# Altium PCB NaviGo v3.0.PcbDoc (part 1 of 4)
Units mm, origin at the board's own origin, x right, y up, seen from the top; angles counter-clockwise.
Board outline 144.78 x 52.07 mm, 2 copper layers (Top Layer, Bottom Layer); 380 components, 29 nets, 1630 pads, 230 vias.
Unrouted connection lines stored in the file: 261.
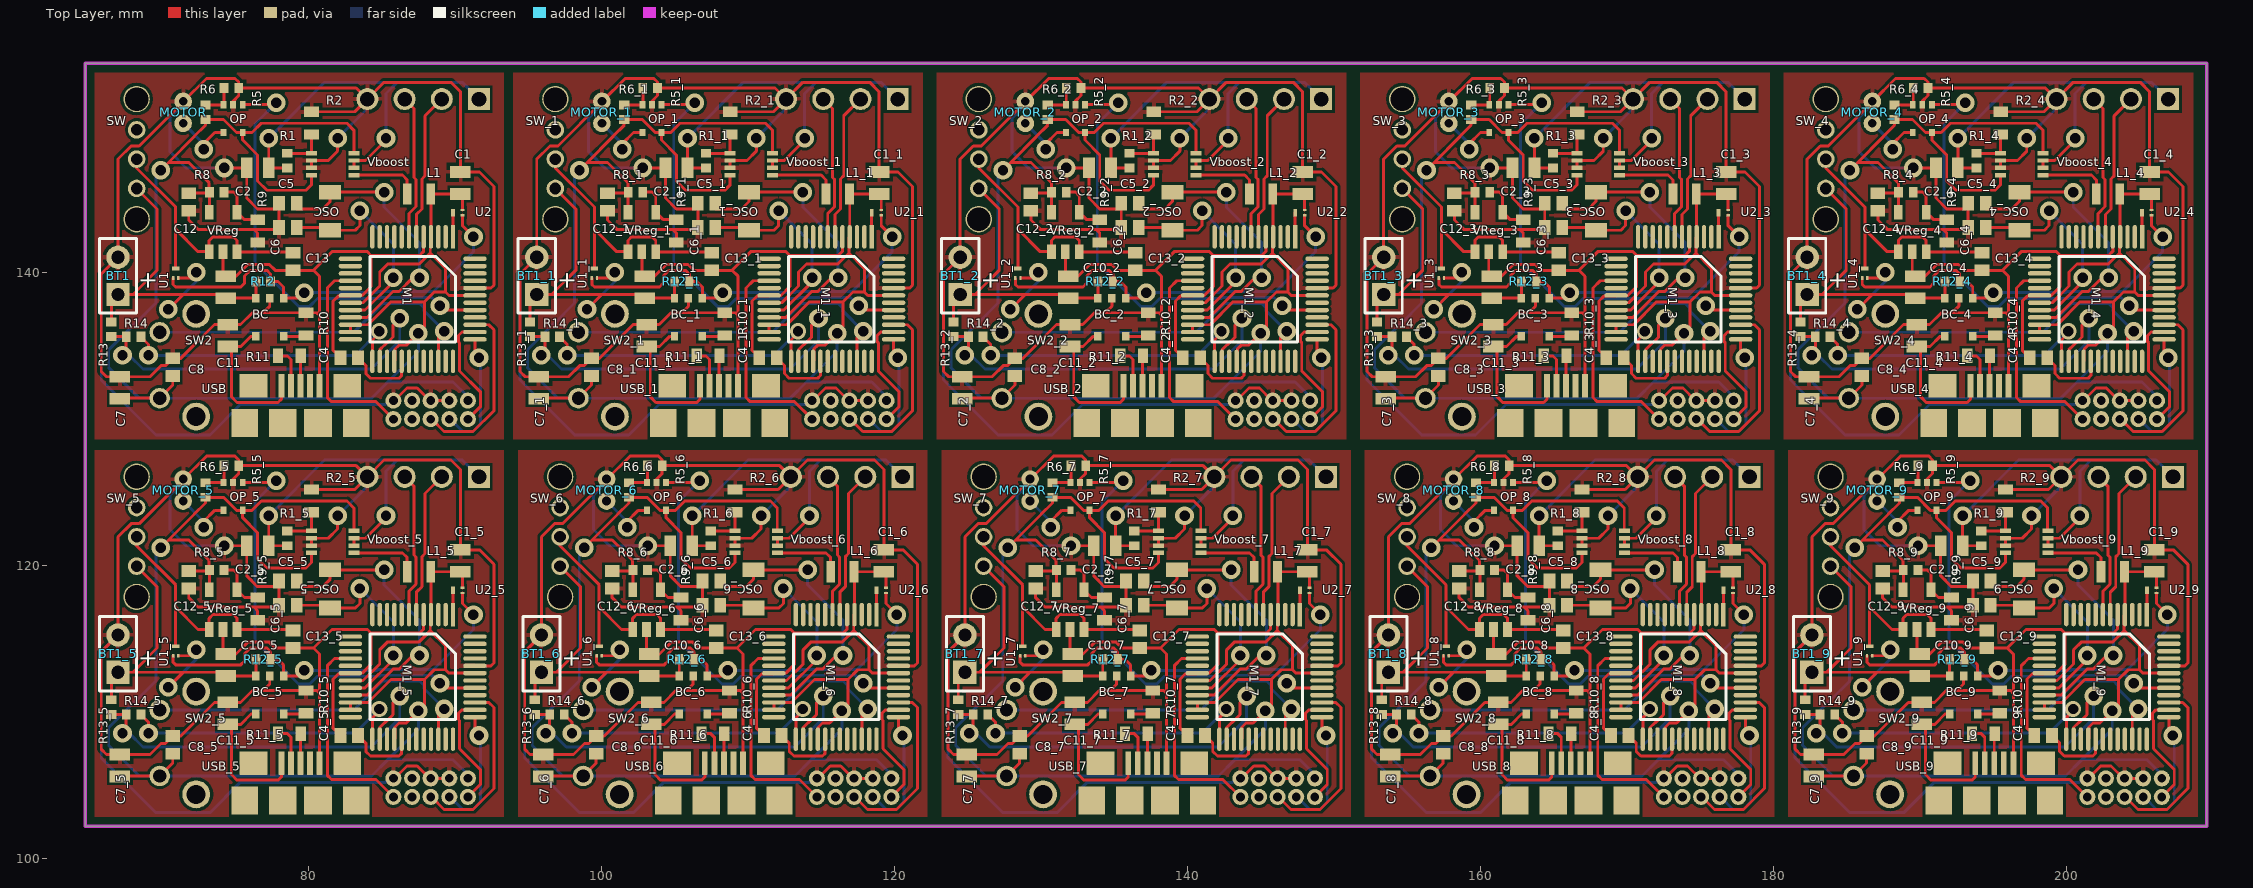
[diagram p0: Top Layer view]
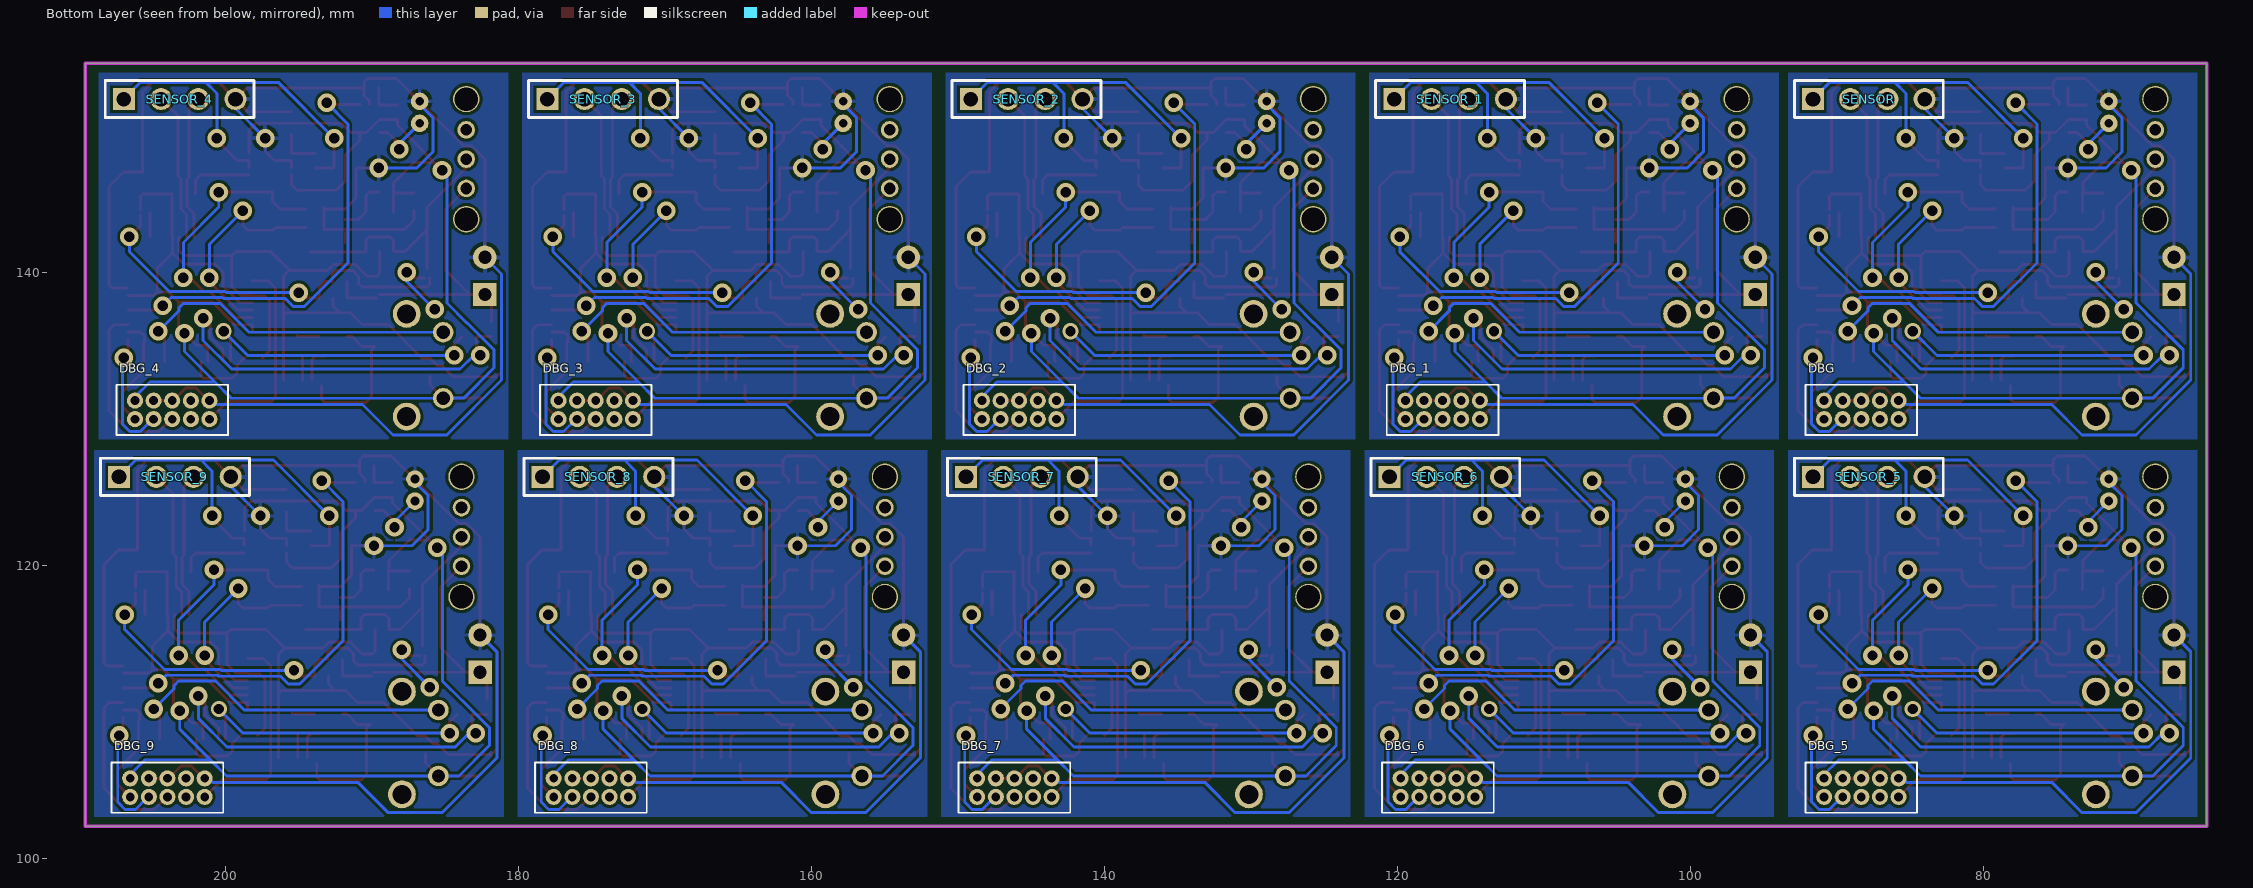
[diagram p1: Bottom Layer view, seen from below]

## Layer stack, top to bottom
Top Layer: signal copper 0.0356
Dielectric: dielectric 0.32, FR-4, Dk 4.8
Bottom Layer: signal copper 0.0356

## Board outline
64.77,102.235 209.55,102.235 209.55,154.305 64.77,154.305

## Design rules (kind name [scope] priority, off if disabled: settings)
Clearance [All] p1: gap=0.2
PolygonConnect [All] p1: connectstyle=Relief reliefconductorwidth=0.254 reliefentries=4 polygonreliefangle="90 Angle" airgapwidth=0.254
RoutingVias [All] p1: holewidth=0.711 width=1.27 viastyle="Through Hole" minholewidth=0.711 minwidth=1.27 maxholewidth=0.711 maxwidth=1.27
SolderMaskExpansion [All] p1: expansion=0.102
Width [All] p1: maxlimit=0.2 minlimit=0.2 preferedwidth=0.2
28 further rules are at their usual default settings.

## Classes and differential pairs
component class "NaviGo v3.0": BC BT1 C1 C2 C4 C5 C6 C7 C8 C10 C11 C12 C13 DBG L1 M1 MOTOR OP OSC R1 R2 R5 R6 R8 R9 R10 R11 R12 R13 R14 SENSOR SW SW2 U1 U2 USB Vboost VReg

## Components (designator, comment, footprint, x,y, rotation, side; value= is the part's Value field where it differs from the comment)
BC "MCP73831T" MCP73831T 78.308,138.271 r180 top
BC_1 "MCP73831T" MCP73831T 106.883,138.271 r180 top (schematic designator BC)
BC_2 "MCP73831T" MCP73831T 135.783,138.271 r180 top (schematic designator BC)
BC_3 "MCP73831T" MCP73831T 164.683,138.271 r180 top (schematic designator BC)
BC_4 "MCP73831T" MCP73831T 193.583,138.271 r180 top (schematic designator BC)
BC_5 "MCP73831T" MCP73831T 78.308,112.49 r180 top (schematic designator BC)
BC_6 "MCP73831T" MCP73831T 107.208,112.49 r180 top (schematic designator BC)
BC_7 "MCP73831T" MCP73831T 136.108,112.49 r180 top (schematic designator BC)
BC_8 "MCP73831T" MCP73831T 165.008,112.49 r180 top (schematic designator BC)
BC_9 "MCP73831T" MCP73831T 193.908,112.49 r180 top (schematic designator BC)
BT1 "Battery" BAT-2 67.005,139.795 r90 top
BT1_1 "Battery" BAT-2 95.58,139.795 r90 top (schematic designator BT1)
BT1_2 "Battery" BAT-2 124.48,139.795 r90 top (schematic designator BT1)
BT1_3 "Battery" BAT-2 153.38,139.795 r90 top (schematic designator BT1)
BT1_4 "Battery" BAT-2 182.28,139.795 r90 top (schematic designator BT1)
BT1_5 "Battery" BAT-2 67.005,114.014 r90 top (schematic designator BT1)
BT1_6 "Battery" BAT-2 95.905,114.014 r90 top (schematic designator BT1)
BT1_7 "Battery" BAT-2 124.805,114.014 r90 top (schematic designator BT1)
BT1_8 "Battery" BAT-2 153.705,114.014 r90 top (schematic designator BT1)
BT1_9 "Battery" BAT-2 182.605,114.014 r90 top (schematic designator BT1)
C1 "4.7u" "Capacitor 0805" 90.373,145.383 r90 top
C1_1 "4.7u" "Capacitor 0805" 118.948,145.383 r90 top (schematic designator C1)
C1_2 "4.7u" "Capacitor 0805" 147.848,145.383 r90 top (schematic designator C1)
C1_3 "4.7u" "Capacitor 0805" 176.748,145.383 r90 top (schematic designator C1)
C1_4 "4.7u" "Capacitor 0805" 205.648,145.383 r90 top (schematic designator C1)
C1_5 "4.7u" "Capacitor 0805" 90.373,119.602 r90 top (schematic designator C1)
C1_6 "4.7u" "Capacitor 0805" 119.273,119.602 r90 top (schematic designator C1)
C1_7 "4.7u" "Capacitor 0805" 148.173,119.602 r90 top (schematic designator C1)
C1_8 "4.7u" "Capacitor 0805" 177.073,119.602 r90 top (schematic designator C1)
C1_9 "4.7u" "Capacitor 0805" 205.973,119.602 r90 top (schematic designator C1)
C2 "10u" "Capacitor 0805" 77.292,147.161 r180 top
C2_1 "10u" "Capacitor 0805" 105.867,147.161 r180 top (schematic designator C2)
C2_2 "10u" "Capacitor 0805" 134.767,147.161 r180 top (schematic designator C2)
C2_3 "10u" "Capacitor 0805" 163.667,147.161 r180 top (schematic designator C2)
C2_4 "10u" "Capacitor 0805" 192.567,147.161 r180 top (schematic designator C2)
C2_5 "10u" "Capacitor 0805" 77.292,121.38 r180 top (schematic designator C2)
C2_6 "10u" "Capacitor 0805" 106.192,121.38 r180 top (schematic designator C2)
C2_7 "10u" "Capacitor 0805" 135.092,121.38 r180 top (schematic designator C2)
C2_8 "10u" "Capacitor 0805" 163.992,121.38 r180 top (schematic designator C2)
C2_9 "10u" "Capacitor 0805" 192.892,121.38 r180 top (schematic designator C2)
C4 "1u" "Capacitor 0402" 83.388,134.207 r180 top
C4_1 "1u" "Capacitor 0402" 111.963,134.207 r180 top (schematic designator C4)
C4_2 "1u" "Capacitor 0402" 140.863,134.207 r180 top (schematic designator C4)
C4_3 "1u" "Capacitor 0402" 169.763,134.207 r180 top (schematic designator C4)
C4_4 "1u" "Capacitor 0402" 198.663,134.207 r180 top (schematic designator C4)
C4_5 "1u" "Capacitor 0402" 83.388,108.426 r180 top (schematic designator C4)
C4_6 "1u" "Capacitor 0402" 112.288,108.426 r180 top (schematic designator C4)
C4_7 "1u" "Capacitor 0402" 141.188,108.426 r180 top (schematic designator C4)
C4_8 "1u" "Capacitor 0402" 170.088,108.426 r180 top (schematic designator C4)
C4_9 "1u" "Capacitor 0402" 198.988,108.426 r180 top (schematic designator C4)
C5 "12p" "Capacitor 0402" 79.197,144.748 r180 top
C5_1 "12p" "Capacitor 0402" 107.772,144.748 r180 top (schematic designator C5)
C5_2 "12p" "Capacitor 0402" 136.672,144.748 r180 top (schematic designator C5)
C5_3 "12p" "Capacitor 0402" 165.572,144.748 r180 top (schematic designator C5)
C5_4 "12p" "Capacitor 0402" 194.472,144.748 r180 top (schematic designator C5)
C5_5 "12p" "Capacitor 0402" 79.197,118.967 r180 top (schematic designator C5)
C5_6 "12p" "Capacitor 0402" 108.097,118.967 r180 top (schematic designator C5)
C5_7 "12p" "Capacitor 0402" 136.997,118.967 r180 top (schematic designator C5)
C5_8 "12p" "Capacitor 0402" 165.897,118.967 r180 top (schematic designator C5)
C5_9 "12p" "Capacitor 0402" 194.797,118.967 r180 top (schematic designator C5)
C6 "12p" "Capacitor 0402" 79.197,143.097 r180 top
C6_1 "12p" "Capacitor 0402" 107.772,143.097 r180 top (schematic designator C6)
C6_2 "12p" "Capacitor 0402" 136.672,143.097 r180 top (schematic designator C6)
C6_3 "12p" "Capacitor 0402" 165.572,143.097 r180 top (schematic designator C6)
C6_4 "12p" "Capacitor 0402" 194.472,143.097 r180 top (schematic designator C6)
C6_5 "12p" "Capacitor 0402" 79.197,117.316 r180 top (schematic designator C6)
C6_6 "12p" "Capacitor 0402" 108.097,117.316 r180 top (schematic designator C6)
C6_7 "12p" "Capacitor 0402" 136.997,117.316 r180 top (schematic designator C6)
C6_8 "12p" "Capacitor 0402" 165.897,117.316 r180 top (schematic designator C6)
C6_9 "12p" "Capacitor 0402" 194.797,117.316 r180 top (schematic designator C6)
C7 "4.7u" "Capacitor 0805" 67.132,131.413 r90 top
C7_1 "4.7u" "Capacitor 0805" 95.707,131.413 r90 top (schematic designator C7)
C7_2 "4.7u" "Capacitor 0805" 124.607,131.413 r90 top (schematic designator C7)
C7_3 "4.7u" "Capacitor 0805" 153.507,131.413 r90 top (schematic designator C7)
C7_4 "4.7u" "Capacitor 0805" 182.407,131.413 r90 top (schematic designator C7)
C7_5 "4.7u" "Capacitor 0805" 67.132,105.632 r90 top (schematic designator C7)
C7_6 "4.7u" "Capacitor 0805" 96.032,105.632 r90 top (schematic designator C7)
C7_7 "4.7u" "Capacitor 0805" 124.932,105.632 r90 top (schematic designator C7)
C7_8 "4.7u" "Capacitor 0805" 153.832,105.632 r90 top (schematic designator C7)
C7_9 "4.7u" "Capacitor 0805" 182.732,105.632 r90 top (schematic designator C7)
C8 "100n" "Capacitor 0402" 70.739,132.969 r90 top
C8_1 "100n" "Capacitor 0402" 99.314,132.969 r90 top (schematic designator C8)
C8_2 "100n" "Capacitor 0402" 128.214,132.969 r90 top (schematic designator C8)
C8_3 "100n" "Capacitor 0402" 157.114,132.969 r90 top (schematic designator C8)
C8_4 "100n" "Capacitor 0402" 186.014,132.969 r90 top (schematic designator C8)
C8_5 "100n" "Capacitor 0402" 70.739,107.188 r90 top (schematic designator C8)
C8_6 "100n" "Capacitor 0402" 99.639,107.188 r90 top (schematic designator C8)
C8_7 "100n" "Capacitor 0402" 128.539,107.188 r90 top (schematic designator C8)
C8_8 "100n" "Capacitor 0402" 157.439,107.188 r90 top (schematic designator C8)
C8_9 "100n" "Capacitor 0402" 186.339,107.188 r90 top (schematic designator C8)
C10 "4.7u" "Capacitor 0805" 74.371,138.271 r90 top
C10_1 "4.7u" "Capacitor 0805" 102.946,138.271 r90 top (schematic designator C10)
C10_2 "4.7u" "Capacitor 0805" 131.846,138.271 r90 top (schematic designator C10)
C10_3 "4.7u" "Capacitor 0805" 160.746,138.271 r90 top (schematic designator C10)
C10_4 "4.7u" "Capacitor 0805" 189.646,138.271 r90 top (schematic designator C10)
C10_5 "4.7u" "Capacitor 0805" 74.371,112.49 r90 top (schematic designator C10)
C10_6 "4.7u" "Capacitor 0805" 103.271,112.49 r90 top (schematic designator C10)
C10_7 "4.7u" "Capacitor 0805" 132.171,112.49 r90 top (schematic designator C10)
C10_8 "4.7u" "Capacitor 0805" 161.071,112.49 r90 top (schematic designator C10)
C10_9 "4.7u" "Capacitor 0805" 189.971,112.49 r90 top (schematic designator C10)
C11 "4.7u" "Capacitor 0805" 74.498,134.969 r90 top
C11_1 "4.7u" "Capacitor 0805" 103.073,134.969 r90 top (schematic designator C11)
C11_2 "4.7u" "Capacitor 0805" 131.973,134.969 r90 top (schematic designator C11)
C11_3 "4.7u" "Capacitor 0805" 160.873,134.969 r90 top (schematic designator C11)
C11_4 "4.7u" "Capacitor 0805" 189.773,134.969 r90 top (schematic designator C11)
C11_5 "4.7u" "Capacitor 0805" 74.498,109.188 r90 top (schematic designator C11)
C11_6 "4.7u" "Capacitor 0805" 103.398,109.188 r90 top (schematic designator C11)
C11_7 "4.7u" "Capacitor 0805" 132.298,109.188 r90 top (schematic designator C11)
C11_8 "4.7u" "Capacitor 0805" 161.198,109.188 r90 top (schematic designator C11)
C11_9 "4.7u" "Capacitor 0805" 190.098,109.188 r90 top (schematic designator C11)
C12 "1u" "Capacitor 0402" 71.831,144.24 r90 top
C12_1 "1u" "Capacitor 0402" 100.406,144.24 r90 top (schematic designator C12)
C12_2 "1u" "Capacitor 0402" 129.306,144.24 r90 top (schematic designator C12)
C12_3 "1u" "Capacitor 0402" 158.206,144.24 r90 top (schematic designator C12)
C12_4 "1u" "Capacitor 0402" 187.106,144.24 r90 top (schematic designator C12)
C12_5 "1u" "Capacitor 0402" 71.831,118.459 r90 top (schematic designator C12)
C12_6 "1u" "Capacitor 0402" 100.731,118.459 r90 top (schematic designator C12)
C12_7 "1u" "Capacitor 0402" 129.631,118.459 r90 top (schematic designator C12)
C12_8 "1u" "Capacitor 0402" 158.531,118.459 r90 top (schematic designator C12)
C12_9 "1u" "Capacitor 0402" 187.431,118.459 r90 top (schematic designator C12)
C13 "1u" "Capacitor 0402" 78.943,140.176 r90 top
C13_1 "1u" "Capacitor 0402" 107.518,140.176 r90 top (schematic designator C13)
C13_2 "1u" "Capacitor 0402" 136.418,140.176 r90 top (schematic designator C13)
C13_3 "1u" "Capacitor 0402" 165.318,140.176 r90 top (schematic designator C13)
C13_4 "1u" "Capacitor 0402" 194.218,140.176 r90 top (schematic designator C13)
C13_5 "1u" "Capacitor 0402" 78.943,114.395 r90 top (schematic designator C13)
C13_6 "1u" "Capacitor 0402" 107.843,114.395 r90 top (schematic designator C13)
C13_7 "1u" "Capacitor 0402" 136.743,114.395 r90 top (schematic designator C13)
C13_8 "1u" "Capacitor 0402" 165.643,114.395 r90 top (schematic designator C13)
C13_9 "1u" "Capacitor 0402" 194.543,114.395 r90 top (schematic designator C13)
DBG "20021111-00010T4LF" 20021111-00010T4LF 88.341,130.651 r0 bottom
DBG_1 "20021111-00010T4LF" 20021111-00010T4LF 116.916,130.651 r0 bottom (schematic designator DBG)
DBG_2 "20021111-00010T4LF" 20021111-00010T4LF 145.816,130.651 r0 bottom (schematic designator DBG)
DBG_3 "20021111-00010T4LF" 20021111-00010T4LF 174.716,130.651 r0 bottom (schematic designator DBG)
DBG_4 "20021111-00010T4LF" 20021111-00010T4LF 203.616,130.651 r0 bottom (schematic designator DBG)
DBG_5 "20021111-00010T4LF" 20021111-00010T4LF 88.341,104.87 r0 bottom (schematic designator DBG)
DBG_6 "20021111-00010T4LF" 20021111-00010T4LF 117.241,104.87 r0 bottom (schematic designator DBG)
DBG_7 "20021111-00010T4LF" 20021111-00010T4LF 146.141,104.87 r0 bottom (schematic designator DBG)
DBG_8 "20021111-00010T4LF" 20021111-00010T4LF 175.041,104.87 r0 bottom (schematic designator DBG)
DBG_9 "20021111-00010T4LF" 20021111-00010T4LF 203.941,104.87 r0 bottom (schematic designator DBG)
L1 "LBR2012T4R7M" LBR2012T4R7M 88.341,145.383 r180 top
L1_1 "LBR2012T4R7M" LBR2012T4R7M 116.916,145.383 r180 top (schematic designator L1)
L1_2 "LBR2012T4R7M" LBR2012T4R7M 145.816,145.383 r180 top (schematic designator L1)
L1_3 "LBR2012T4R7M" LBR2012T4R7M 174.716,145.383 r180 top (schematic designator L1)
L1_4 "LBR2012T4R7M" LBR2012T4R7M 203.616,145.383 r180 top (schematic designator L1)
L1_5 "LBR2012T4R7M" LBR2012T4R7M 88.341,119.602 r180 top (schematic designator L1)
L1_6 "LBR2012T4R7M" LBR2012T4R7M 117.241,119.602 r180 top (schematic designator L1)
L1_7 "LBR2012T4R7M" LBR2012T4R7M 146.141,119.602 r180 top (schematic designator L1)
L1_8 "LBR2012T4R7M" LBR2012T4R7M 175.041,119.602 r180 top (schematic designator L1)
L1_9 "LBR2012T4R7M" LBR2012T4R7M 203.941,119.602 r180 top (schematic designator L1)
M1 "EFM32TG822" EFM32TG822 89.865,142.462 r270 top
M1_1 "EFM32TG822" EFM32TG822 118.44,142.462 r270 top (schematic designator M1)
M1_2 "EFM32TG822" EFM32TG822 147.34,142.462 r270 top (schematic designator M1)
M1_3 "EFM32TG822" EFM32TG822 176.24,142.462 r270 top (schematic designator M1)
M1_4 "EFM32TG822" EFM32TG822 205.14,142.462 r270 top (schematic designator M1)
M1_5 "EFM32TG822" EFM32TG822 89.865,116.681 r270 top (schematic designator M1)
M1_6 "EFM32TG822" EFM32TG822 118.765,116.681 r270 top (schematic designator M1)
M1_7 "EFM32TG822" EFM32TG822 147.665,116.681 r270 top (schematic designator M1)
M1_8 "EFM32TG822" EFM32TG822 176.565,116.681 r270 top (schematic designator M1)
M1_9 "EFM32TG822" EFM32TG822 205.465,116.681 r270 top (schematic designator M1)
MOTOR "Motor" Motor 71.45,150.209 r90 top
MOTOR_1 "Motor" Motor 100.025,150.209 r90 top (schematic designator MOTOR)
MOTOR_2 "Motor" Motor 128.925,150.209 r90 top (schematic designator MOTOR)
MOTOR_3 "Motor" Motor 157.825,150.209 r90 top (schematic designator MOTOR)
MOTOR_4 "Motor" Motor 186.725,150.209 r90 top (schematic designator MOTOR)
MOTOR_5 "Motor" Motor 71.45,124.428 r90 top (schematic designator MOTOR)
MOTOR_6 "Motor" Motor 100.35,124.428 r90 top (schematic designator MOTOR)
MOTOR_7 "Motor" Motor 129.25,124.428 r90 top (schematic designator MOTOR)
MOTOR_8 "Motor" Motor 158.15,124.428 r90 top (schematic designator MOTOR)
MOTOR_9 "Motor" Motor 187.05,124.428 r90 top (schematic designator MOTOR)
OP "LMV321SQ3T2G" LMV321SQ3T2G 75.514,151.479 r270 top
OP_1 "LMV321SQ3T2G" LMV321SQ3T2G 104.089,151.479 r270 top (schematic designator OP)
OP_2 "LMV321SQ3T2G" LMV321SQ3T2G 132.989,151.479 r270 top (schematic designator OP)
OP_3 "LMV321SQ3T2G" LMV321SQ3T2G 161.889,151.479 r270 top (schematic designator OP)
OP_4 "LMV321SQ3T2G" LMV321SQ3T2G 190.789,151.479 r270 top (schematic designator OP)
OP_5 "LMV321SQ3T2G" LMV321SQ3T2G 75.514,125.698 r270 top (schematic designator OP)
OP_6 "LMV321SQ3T2G" LMV321SQ3T2G 104.414,125.698 r270 top (schematic designator OP)
OP_7 "LMV321SQ3T2G" LMV321SQ3T2G 133.314,125.698 r270 top (schematic designator OP)
OP_8 "LMV321SQ3T2G" LMV321SQ3T2G 162.214,125.698 r270 top (schematic designator OP)
OP_9 "LMV321SQ3T2G" LMV321SQ3T2G 191.114,125.698 r270 top (schematic designator OP)
OSC "ST3215SB32768H5HSZA1" ST3215SB32768H5HSZA1 81.483,145.51 r270 top
OSC_1 "ST3215SB32768H5HSZA1" ST3215SB32768H5HSZA1 110.058,145.51 r270 top (schematic designator OSC)
OSC_2 "ST3215SB32768H5HSZA1" ST3215SB32768H5HSZA1 138.958,145.51 r270 top (schematic designator OSC)
OSC_3 "ST3215SB32768H5HSZA1" ST3215SB32768H5HSZA1 167.858,145.51 r270 top (schematic designator OSC)
OSC_4 "ST3215SB32768H5HSZA1" ST3215SB32768H5HSZA1 196.758,145.51 r270 top (schematic designator OSC)
OSC_5 "ST3215SB32768H5HSZA1" ST3215SB32768H5HSZA1 81.483,119.729 r270 top (schematic designator OSC)
OSC_6 "ST3215SB32768H5HSZA1" ST3215SB32768H5HSZA1 110.383,119.729 r270 top (schematic designator OSC)
OSC_7 "ST3215SB32768H5HSZA1" ST3215SB32768H5HSZA1 139.283,119.729 r270 top (schematic designator OSC)
OSC_8 "ST3215SB32768H5HSZA1" ST3215SB32768H5HSZA1 168.183,119.729 r270 top (schematic designator OSC)
OSC_9 "ST3215SB32768H5HSZA1" ST3215SB32768H5HSZA1 197.083,119.729 r270 top (schematic designator OSC)
R1 "1M" "Resistor 0403" 78.562,147.161 r90 top
R1_1 "1M" "Resistor 0403" 107.137,147.161 r90 top (schematic designator R1)
R1_2 "1M" "Resistor 0403" 136.037,147.161 r90 top (schematic designator R1)
R1_3 "1M" "Resistor 0403" 164.937,147.161 r90 top (schematic designator R1)
R1_4 "1M" "Resistor 0403" 193.837,147.161 r90 top (schematic designator R1)
R1_5 "1M" "Resistor 0403" 78.562,121.38 r90 top (schematic designator R1)
R1_6 "1M" "Resistor 0403" 107.462,121.38 r90 top (schematic designator R1)
R1_7 "1M" "Resistor 0403" 136.362,121.38 r90 top (schematic designator R1)
R1_8 "1M" "Resistor 0403" 165.262,121.38 r90 top (schematic designator R1)
R1_9 "1M" "Resistor 0403" 194.162,121.38 r90 top (schematic designator R1)
R2 "324k" "Resistor 0603" 80.213,149.447 r90 top
R2_1 "324k" "Resistor 0603" 108.788,149.447 r90 top (schematic designator R2)
R2_2 "324k" "Resistor 0603" 137.688,149.447 r90 top (schematic designator R2)
R2_3 "324k" "Resistor 0603" 166.588,149.447 r90 top (schematic designator R2)
R2_4 "324k" "Resistor 0603" 195.488,149.447 r90 top (schematic designator R2)
R2_5 "324k" "Resistor 0603" 80.213,123.666 r90 top (schematic designator R2)
R2_6 "324k" "Resistor 0603" 109.113,123.666 r90 top (schematic designator R2)
R2_7 "324k" "Resistor 0603" 138.013,123.666 r90 top (schematic designator R2)
R2_8 "324k" "Resistor 0603" 166.913,123.666 r90 top (schematic designator R2)
R2_9 "324k" "Resistor 0603" 195.813,123.666 r90 top (schematic designator R2)
R5 "1M" "Resistor 0403" 74.244,152.622 r0 top
R5_1 "1M" "Resistor 0403" 102.819,152.622 r0 top (schematic designator R5)
R5_2 "1M" "Resistor 0403" 131.719,152.622 r0 top (schematic designator R5)
R5_3 "1M" "Resistor 0403" 160.619,152.622 r0 top (schematic designator R5)
R5_4 "1M" "Resistor 0403" 189.519,152.622 r0 top (schematic designator R5)
R5_5 "1M" "Resistor 0403" 74.244,126.841 r0 top (schematic designator R5)
R5_6 "1M" "Resistor 0403" 103.144,126.841 r0 top (schematic designator R5)
R5_7 "1M" "Resistor 0403" 132.044,126.841 r0 top (schematic designator R5)
R5_8 "1M" "Resistor 0403" 160.944,126.841 r0 top (schematic designator R5)
R5_9 "1M" "Resistor 0403" 189.844,126.841 r0 top (schematic designator R5)
R6 "1M" "Resistor 0403" 72.974,150.463 r90 top
R6_1 "1M" "Resistor 0403" 101.549,150.463 r90 top (schematic designator R6)
R6_2 "1M" "Resistor 0403" 130.449,150.463 r90 top (schematic designator R6)
R6_3 "1M" "Resistor 0403" 159.349,150.463 r90 top (schematic designator R6)
R6_4 "1M" "Resistor 0403" 188.249,150.463 r90 top (schematic designator R6)
R6_5 "1M" "Resistor 0403" 72.974,124.682 r90 top (schematic designator R6)
R6_6 "1M" "Resistor 0403" 101.874,124.682 r90 top (schematic designator R6)
R6_7 "1M" "Resistor 0403" 130.774,124.682 r90 top (schematic designator R6)
R6_8 "1M" "Resistor 0403" 159.674,124.682 r90 top (schematic designator R6)
R6_9 "1M" "Resistor 0403" 188.574,124.682 r90 top (schematic designator R6)
R8 "1M" "Resistor 0403" 74.244,145.51 r180 top
R8_1 "1M" "Resistor 0403" 102.819,145.51 r180 top (schematic designator R8)
R8_2 "1M" "Resistor 0403" 131.719,145.51 r180 top (schematic designator R8)
R8_3 "1M" "Resistor 0403" 160.619,145.51 r180 top (schematic designator R8)
R8_4 "1M" "Resistor 0403" 189.519,145.51 r180 top (schematic designator R8)
R8_5 "1M" "Resistor 0403" 74.244,119.729 r180 top (schematic designator R8)
R8_6 "1M" "Resistor 0403" 103.144,119.729 r180 top (schematic designator R8)
R8_7 "1M" "Resistor 0403" 132.044,119.729 r180 top (schematic designator R8)
R8_8 "1M" "Resistor 0403" 160.944,119.729 r180 top (schematic designator R8)
R8_9 "1M" "Resistor 0403" 189.844,119.729 r180 top (schematic designator R8)
R9 "536k" "Resistor 0603" 76.53,142.081 r90 top
R9_1 "536k" "Resistor 0603" 105.105,142.081 r90 top (schematic designator R9)
R9_2 "536k" "Resistor 0603" 134.005,142.081 r90 top (schematic designator R9)
R9_3 "536k" "Resistor 0603" 162.905,142.081 r90 top (schematic designator R9)
R9_4 "536k" "Resistor 0603" 191.805,142.081 r90 top (schematic designator R9)
R9_5 "536k" "Resistor 0603" 76.53,116.3 r90 top (schematic designator R9)
R9_6 "536k" "Resistor 0603" 105.43,116.3 r90 top (schematic designator R9)
R9_7 "536k" "Resistor 0603" 134.33,116.3 r90 top (schematic designator R9)
R9_8 "536k" "Resistor 0603" 163.23,116.3 r90 top (schematic designator R9)
R9_9 "536k" "Resistor 0603" 192.13,116.3 r90 top (schematic designator R9)
R10 "3k" "Resistor 0603" 79.832,135.731 r90 top
R10_1 "3k" "Resistor 0603" 108.407,135.731 r90 top (schematic designator R10)
R10_2 "3k" "Resistor 0603" 137.307,135.731 r90 top (schematic designator R10)
R10_3 "3k" "Resistor 0603" 166.207,135.731 r90 top (schematic designator R10)
R10_4 "3k" "Resistor 0603" 195.107,135.731 r90 top (schematic designator R10)
R10_5 "3k" "Resistor 0603" 79.832,109.95 r90 top (schematic designator R10)
R10_6 "3k" "Resistor 0603" 108.732,109.95 r90 top (schematic designator R10)
R10_7 "3k" "Resistor 0603" 137.632,109.95 r90 top (schematic designator R10)
R10_8 "3k" "Resistor 0603" 166.532,109.95 r90 top (schematic designator R10)
R10_9 "3k" "Resistor 0603" 195.432,109.95 r90 top (schematic designator R10)
R11 "150R" "Resistor 0603" 77.927,134.334 r0 top
R11_1 "150R" "Resistor 0603" 106.502,134.334 r0 top (schematic designator R11)
R11_2 "150R" "Resistor 0603" 135.402,134.334 r0 top (schematic designator R11)
R11_3 "150R" "Resistor 0603" 164.302,134.334 r0 top (schematic designator R11)
R11_4 "150R" "Resistor 0603" 193.202,134.334 r0 top (schematic designator R11)
R11_5 "150R" "Resistor 0603" 77.927,108.553 r0 top (schematic designator R11)
R11_6 "150R" "Resistor 0603" 106.827,108.553 r0 top (schematic designator R11)
R11_7 "150R" "Resistor 0603" 135.727,108.553 r0 top (schematic designator R11)
R11_8 "150R" "Resistor 0603" 164.627,108.553 r0 top (schematic designator R11)
R11_9 "150R" "Resistor 0603" 193.527,108.553 r0 top (schematic designator R11)
R12 "18.7k" "Resistor 0403" 77.419,139.414 r180 top
R12_1 "18.7k" "Resistor 0403" 105.994,139.414 r180 top (schematic designator R12)
R12_2 "18.7k" "Resistor 0403" 134.894,139.414 r180 top (schematic designator R12)
R12_3 "18.7k" "Resistor 0403" 163.794,139.414 r180 top (schematic designator R12)
R12_4 "18.7k" "Resistor 0403" 192.694,139.414 r180 top (schematic designator R12)
R12_5 "18.7k" "Resistor 0403" 77.419,113.633 r180 top (schematic designator R12)
R12_6 "18.7k" "Resistor 0403" 106.319,113.633 r180 top (schematic designator R12)
R12_7 "18.7k" "Resistor 0403" 135.219,113.633 r180 top (schematic designator R12)
R12_8 "18.7k" "Resistor 0403" 164.119,113.633 r180 top (schematic designator R12)
R12_9 "18.7k" "Resistor 0403" 193.019,113.633 r180 top (schematic designator R12)
R13 "1M" "Resistor 0403" 66.548,136.652 r270 top
R13_1 "1M" "Resistor 0403" 95.123,136.652 r270 top (schematic designator R13)
R13_2 "1M" "Resistor 0403" 124.023,136.652 r270 top (schematic designator R13)
R13_3 "1M" "Resistor 0403" 152.923,136.652 r270 top (schematic designator R13)
R13_4 "1M" "Resistor 0403" 181.823,136.652 r270 top (schematic designator R13)
R13_5 "1M" "Resistor 0403" 66.548,110.871 r270 top (schematic designator R13)
R13_6 "1M" "Resistor 0403" 95.448,110.871 r270 top (schematic designator R13)
R13_7 "1M" "Resistor 0403" 124.348,110.871 r270 top (schematic designator R13)
R13_8 "1M" "Resistor 0403" 153.248,110.871 r270 top (schematic designator R13)
R13_9 "1M" "Resistor 0403" 182.148,110.871 r270 top (schematic designator R13)
R14 "1M" "Resistor 0403" 67.564,135.636 r0 top
R14_1 "1M" "Resistor 0403" 96.139,135.636 r0 top (schematic designator R14)
R14_2 "1M" "Resistor 0403" 125.039,135.636 r0 top (schematic designator R14)
R14_3 "1M" "Resistor 0403" 153.939,135.636 r0 top (schematic designator R14)
R14_4 "1M" "Resistor 0403" 182.839,135.636 r0 top (schematic designator R14)
R14_5 "1M" "Resistor 0403" 67.564,109.855 r0 top (schematic designator R14)
R14_6 "1M" "Resistor 0403" 96.464,109.855 r0 top (schematic designator R14)
R14_7 "1M" "Resistor 0403" 125.364,109.855 r0 top (schematic designator R14)
R14_8 "1M" "Resistor 0403" 154.264,109.855 r0 top (schematic designator R14)
R14_9 "1M" "Resistor 0403" 183.164,109.855 r0 top (schematic designator R14)
SENSOR "Header 4" HDR1X4 91.643,151.86 r180 bottom
SENSOR_1 "Header 4" HDR1X4 120.218,151.86 r180 bottom (schematic designator SENSOR)
SENSOR_2 "Header 4" HDR1X4 149.118,151.86 r180 bottom (schematic designator SENSOR)
SENSOR_3 "Header 4" HDR1X4 178.018,151.86 r180 bottom (schematic designator SENSOR)
SENSOR_4 "Header 4" HDR1X4 206.918,151.86 r180 bottom (schematic designator SENSOR)
SENSOR_5 "Header 4" HDR1X4 91.643,126.079 r180 bottom (schematic designator SENSOR)
SENSOR_6 "Header 4" HDR1X4 120.543,126.079 r180 bottom (schematic designator SENSOR)
SENSOR_7 "Header 4" HDR1X4 149.443,126.079 r180 bottom (schematic designator SENSOR)
SENSOR_8 "Header 4" HDR1X4 178.343,126.079 r180 bottom (schematic designator SENSOR)
SENSOR_9 "Header 4" HDR1X4 207.243,126.079 r180 bottom (schematic designator SENSOR)
SW "EG1247" EG1247 68.275,145.764 r90 top
SW2 "2-1825027-0" 2-1825027-0 72.339,133.699 r270 top
SW2_1 "2-1825027-0" 2-1825027-0 100.914,133.699 r270 top (schematic designator SW2)
SW2_2 "2-1825027-0" 2-1825027-0 129.814,133.699 r270 top (schematic designator SW2)
SW2_3 "2-1825027-0" 2-1825027-0 158.714,133.699 r270 top (schematic designator SW2)
SW2_4 "2-1825027-0" 2-1825027-0 187.614,133.699 r270 top (schematic designator SW2)
SW2_5 "2-1825027-0" 2-1825027-0 72.339,107.918 r270 top (schematic designator SW2)
SW2_6 "2-1825027-0" 2-1825027-0 101.239,107.918 r270 top (schematic designator SW2)
SW2_7 "2-1825027-0" 2-1825027-0 130.139,107.918 r270 top (schematic designator SW2)
SW2_8 "2-1825027-0" 2-1825027-0 159.039,107.918 r270 top (schematic designator SW2)
SW2_9 "2-1825027-0" 2-1825027-0 187.939,107.918 r270 top (schematic designator SW2)
SW_1 "EG1247" EG1247 96.85,145.764 r90 top (schematic designator SW)
SW_2 "EG1247" EG1247 125.75,145.764 r90 top (schematic designator SW)
SW_3 "EG1247" EG1247 154.65,145.764 r90 top (schematic designator SW)
SW_4 "EG1247" EG1247 183.55,145.764 r90 top (schematic designator SW)
SW_5 "EG1247" EG1247 68.275,119.983 r90 top (schematic designator SW)
SW_6 "EG1247" EG1247 97.175,119.983 r90 top (schematic designator SW)
SW_7 "EG1247" EG1247 126.075,119.983 r90 top (schematic designator SW)
SW_8 "EG1247" EG1247 154.975,119.983 r90 top (schematic designator SW)
SW_9 "EG1247" EG1247 183.875,119.983 r90 top (schematic designator SW)
U1 "CSD23382F4T" CSD23382F4T 70.942,140.303 r0 top
U1_1 "CSD23382F4T" CSD23382F4T 99.517,140.303 r0 top (schematic designator U1)
U1_2 "CSD23382F4T" CSD23382F4T 128.417,140.303 r0 top (schematic designator U1)
U1_3 "CSD23382F4T" CSD23382F4T 157.317,140.303 r0 top (schematic designator U1)
U1_4 "CSD23382F4T" CSD23382F4T 186.217,140.303 r0 top (schematic designator U1)
U1_5 "CSD23382F4T" CSD23382F4T 70.942,114.522 r0 top (schematic designator U1)
U1_6 "CSD23382F4T" CSD23382F4T 99.842,114.522 r0 top (schematic designator U1)
U1_7 "CSD23382F4T" CSD23382F4T 128.742,114.522 r0 top (schematic designator U1)
U1_8 "CSD23382F4T" CSD23382F4T 157.642,114.522 r0 top (schematic designator U1)
U1_9 "CSD23382F4T" CSD23382F4T 186.542,114.522 r0 top (schematic designator U1)
U2 "CSD23382F4T" CSD23382F4T 89.865,144.113 r90 top
U2_1 "CSD23382F4T" CSD23382F4T 118.44,144.113 r90 top (schematic designator U2)
U2_2 "CSD23382F4T" CSD23382F4T 147.34,144.113 r90 top (schematic designator U2)
U2_3 "CSD23382F4T" CSD23382F4T 176.24,144.113 r90 top (schematic designator U2)
U2_4 "CSD23382F4T" CSD23382F4T 205.14,144.113 r90 top (schematic designator U2)
U2_5 "CSD23382F4T" CSD23382F4T 89.865,118.332 r90 top (schematic designator U2)
U2_6 "CSD23382F4T" CSD23382F4T 118.765,118.332 r90 top (schematic designator U2)
U2_7 "CSD23382F4T" CSD23382F4T 147.665,118.332 r90 top (schematic designator U2)
U2_8 "CSD23382F4T" CSD23382F4T 176.565,118.332 r90 top (schematic designator U2)
U2_9 "CSD23382F4T" CSD23382F4T 205.465,118.332 r90 top (schematic designator U2)
USB "649-10118192-0001LF" 649-10118192-0001LF 79.451,129.762 r0 top
USB_1 "649-10118192-0001LF" 649-10118192-0001LF 108.026,129.762 r0 top (schematic designator USB)
USB_2 "649-10118192-0001LF" 649-10118192-0001LF 136.926,129.762 r0 top (schematic designator USB)
USB_3 "649-10118192-0001LF" 649-10118192-0001LF 165.826,129.762 r0 top (schematic designator USB)
USB_4 "649-10118192-0001LF" 649-10118192-0001LF 194.726,129.762 r0 top (schematic designator USB)
USB_5 "649-10118192-0001LF" 649-10118192-0001LF 79.451,103.981 r0 top (schematic designator USB)
USB_6 "649-10118192-0001LF" 649-10118192-0001LF 108.351,103.981 r0 top (schematic designator USB)
USB_7 "649-10118192-0001LF" 649-10118192-0001LF 137.251,103.981 r0 top (schematic designator USB)
USB_8 "649-10118192-0001LF" 649-10118192-0001LF 166.151,103.981 r0 top (schematic designator USB)
USB_9 "649-10118192-0001LF" 649-10118192-0001LF 195.051,103.981 r0 top (schematic designator USB)
Vboost "MCP1640T-I/MC" MCP1640T-I/MC 80.207,148.172 r0 top
Vboost_1 "MCP1640T-I/MC" MCP1640T-I/MC 108.782,148.172 r0 top (schematic designator Vboost)
Vboost_2 "MCP1640T-I/MC" MCP1640T-I/MC 137.682,148.172 r0 top (schematic designator Vboost)
Vboost_3 "MCP1640T-I/MC" MCP1640T-I/MC 166.582,148.172 r0 top (schematic designator Vboost)
Vboost_4 "MCP1640T-I/MC" MCP1640T-I/MC 195.482,148.172 r0 top (schematic designator Vboost)
Vboost_5 "MCP1640T-I/MC" MCP1640T-I/MC 80.207,122.391 r0 top (schematic designator Vboost)
Vboost_6 "MCP1640T-I/MC" MCP1640T-I/MC 109.107,122.391 r0 top (schematic designator Vboost)
Vboost_7 "MCP1640T-I/MC" MCP1640T-I/MC 138.007,122.391 r0 top (schematic designator Vboost)
Vboost_8 "MCP1640T-I/MC" MCP1640T-I/MC 166.907,122.391 r0 top (schematic designator Vboost)
Vboost_9 "MCP1640T-I/MC" MCP1640T-I/MC 195.807,122.391 r0 top (schematic designator Vboost)
VReg "TPS78001DDCR" TPS78001DDCR 73.228,141.446 r0 top
VReg_1 "TPS78001DDCR" TPS78001DDCR 101.803,141.446 r0 top (schematic designator VReg)
VReg_2 "TPS78001DDCR" TPS78001DDCR 130.703,141.446 r0 top (schematic designator VReg)
VReg_3 "TPS78001DDCR" TPS78001DDCR 159.603,141.446 r0 top (schematic designator VReg)
VReg_4 "TPS78001DDCR" TPS78001DDCR 188.503,141.446 r0 top (schematic designator VReg)
VReg_5 "TPS78001DDCR" TPS78001DDCR 73.228,115.665 r0 top (schematic designator VReg)
VReg_6 "TPS78001DDCR" TPS78001DDCR 102.128,115.665 r0 top (schematic designator VReg)
VReg_7 "TPS78001DDCR" TPS78001DDCR 131.028,115.665 r0 top (schematic designator VReg)
VReg_8 "TPS78001DDCR" TPS78001DDCR 159.928,115.665 r0 top (schematic designator VReg)
VReg_9 "TPS78001DDCR" TPS78001DDCR 188.828,115.665 r0 top (schematic designator VReg)

## Footprints (in the part's own frame and the unit in brackets; to place one, negate y for a bottom-side part, rotate by r counter-clockwise, add the part's x,y. Pads: shape width x height; smd on the part's side, far side on the other; paste and mask are expansions set on the pad)
2-1825027-0 [mm]
  round 1.4 hole 0.9: 1(-2.25,-2.49) 2(2.25,-2.49)
  round 1.9 hole 1.3: ""(-3.505,0) ""(3.505,0)
649-10118192-0001LF [mm]
  rect 0.4x1.6 smd: 1(-1.3,2.55) 2(-0.65,2.55) 3(0,2.55) 4(0.65,2.55) 5(1.3,2.55)
  rect 1.8x1.9 smd: ""(-3.8,0) ""(3.8,0)
  rect 1.9x1.6 smd: ""(-3.2,2.55) ""(3.2,2.55)
  rect 1.9x1.9 smd: ""(-1.2,0) ""(1.2,0)
20021111-00010T4LF [mm]
  round 1.1 hole 0.6: 1(-2.54,0.635) 2(-1.27,0.635) 3(0,0.635) 4(1.27,0.635) 5(2.54,0.635) 6(-2.54,-0.635) 7(-1.27,-0.635) 8(0,-0.635) 9(1.27,-0.635) 10(2.54,-0.635)
  silkscreen extent -3.81,-1.72 3.81,1.72
BAT-2 [mm] "Battery; 2 Leads"
  rect 1.6x1.6 hole 0.9: 1(-1.27,0)
  round 1.6 hole 0.9: 2(1.27,0)
  silkscreen extent -2.54,-1.27 2.54,1.27
"Capacitor 0402" [mm]
  rect 0.8x1 smd: 1(0,0) 2(1.2,0)
"Capacitor 0805" [mm]
  rect 0.8x1.4 smd: 1(0,0) 2(1.5,0)
CSD23382F4T [mm]
  rect 0.51x0.26 smd: 1(0,0)
  rect 0.16x0.26 smd: 2(-0.175,-0.65) 3(0.175,-0.65)
EFM32TG822 [mm]
  rect 1.6x0.3 smd: 1(0,0)
  oval 1.6x0.3 smd: 2(0,-0.5) 3(0,-1) 4(0,-1.5) 5(0,-2) 6(0,-2.5) 7(0,-3) 8(0,-3.5) 9(0,-4) 10(0,-4.5) 11(0,-5) 12(0,-5.5) 25(8.5,-5.5) 26(8.5,-5) 27(8.5,-4.5) 28(8.5,-4) 29(8.5,-3.5) 30(8.5,-3) 31(8.5,-2.5) 32(8.5,-2) 33(8.5,-1.5) 34(8.5,-1) 35(8.5,-0.5) 36(8.5,0)
  oval 0.3x1.6 smd: 13(1.5,-7) 14(2,-7) 15(2.5,-7) 16(3,-7) 17(3.5,-7) 18(4,-7) 19(4.5,-7) 20(5,-7) 21(5.5,-7) 22(6,-7) 23(6.5,-7) 24(7,-7) 37(7,1.5) 38(6.5,1.5) 39(6,1.5) 40(5.5,1.5) 41(5,1.5) 42(4.5,1.5) 43(4,1.5) 44(3.5,1.5) 45(3,1.5) 46(2.5,1.5) 47(2,1.5) 48(1.5,1.5)
  silkscreen extent 1.33,-5.66 7.16,0.17
EG1247 [mm]
  round 1.2 hole 0.8: 1(0,0) 2(2,0) 3(4,0)
  round 1.8 hole 1.6: ""(-2.1,0) ""(6.1,0)
HDR1X4 [mm] "Connector; Header; 4 Position"
  rect 1.5x1.5 hole 1: 1(0,0)
  round 1.5 hole 1: 2(2.54,0) 3(5.08,0) 4(7.62,0)
  silkscreen extent -1.27,-1.27 8.89,1.27
LBR2012T4R7M [mm]
  rect 0.6x1.45 smd: 1(0,0) 2(1.6,0)
LMV321SQ3T2G [mm]
  rect 0.5x0.4 smd: 1(0,0) 2(0,-0.65) 3(0,-1.3) 4(1.9,-1.3) 5(1.9,0)
MCP1640T-I/MC [mm]
  rect 0.75x0.3 smd: 1(0,0) 2(0,-0.5) 3(0,-1) 4(0,-1.5) 5(2.9,-1.5) 6(2.9,-1) 7(2.9,-0.5) 8(2.9,0)
MCP73831T [mm]
  rect 0.51x0.6 smd: 1(0,0) 2(0.95,0) 3(1.9,0) 4(1.9,2.6) 5(0,2.6)
Motor [mm]
  round 1.2 hole 0.6: 1(0,0) 2(1.5,0)
"Resistor 0403" [mm]
  rect 0.6x0.7 smd: 1(0,0) 2(1,0)
"Resistor 0603" [mm]
  rect 0.7x1 smd: 1(0,0) 2(1.55,0)
ST3215SB32768H5HSZA1 [mm]
  rect 1x1.5 smd: 1(0,0) 2(2.6,0)
TPS78001DDCR [mm]
  rect 0.6x1 smd: 1(0,0) 2(0.95,0) 3(1.9,0) 4(1.9,2.7) 5(0,2.7)

## Part data
BT1 BT1_1 BT1_2 BT1_3 BT1_4 BT1_5 BT1_6 BT1_7 BT1_8 BT1_9: "Multicell Battery"
C1 C1_1 C1_2 C1_3 C1_4 C1_5 C1_6 C1_7 C1_8 C1_9 C2 C2_1 C2_2 C2_3 C2_4 C2_5 C2_6 C2_7 C2_8 C2_9 C7 C7_1 C7_2 C7_3 C7_4 C7_5 C7_6 C7_7 C7_8 C7_9 C10 C10_1 C10_2 C10_3 C10_4 C10_5 C10_6 C10_7 C10_8 C10_9 C11 C11_1 C11_2 C11_3 C11_4 C11_5 C11_6 C11_7 C11_8 C11_9: library part "Capacitor 0805"
C4 C4_1 C4_2 C4_3 C4_4 C4_5 C4_6 C4_7 C4_8 C4_9 C5 C5_1 C5_2 C5_3 C5_4 C5_5 C5_6 C5_7 C5_8 C5_9 C6 C6_1 C6_2 C6_3 C6_4 C6_5 C6_6 C6_7 C6_8 C6_9 C8 C8_1 C8_2 C8_3 C8_4 C8_5 C8_6 C8_7 C8_8 C8_9 C12 C12_1 C12_2 C12_3 C12_4 C12_5 C12_6 C12_7 C12_8 C12_9 C13 C13_1 C13_2 C13_3 C13_4 C13_5 C13_6 C13_7 C13_8 C13_9: library part "Capacitor 0402"
R1 R1_1 R1_2 R1_3 R1_4 R1_5 R1_6 R1_7 R1_8 R1_9 R5 R5_1 R5_2 R5_3 R5_4 R5_5 R5_6 R5_7 R5_8 R5_9 R6 R6_1 R6_2 R6_3 R6_4 R6_5 R6_6 R6_7 R6_8 R6_9 R8 R8_1 R8_2 R8_3 R8_4 R8_5 R8_6 R8_7 R8_8 R8_9 R12 R12_1 R12_2 R12_3 R12_4 R12_5 R12_6 R12_7 R12_8 R12_9 R13 R13_1 R13_2 R13_3 R13_4 R13_5 R13_6 R13_7 R13_8 R13_9 R14 R14_1 R14_2 R14_3 R14_4 R14_5 R14_6 R14_7 R14_8 R14_9: library part "Resistor 0403"
R2 R2_1 R2_2 R2_3 R2_4 R2_5 R2_6 R2_7 R2_8 R2_9 R9 R9_1 R9_2 R9_3 R9_4 R9_5 R9_6 R9_7 R9_8 R9_9 R10 R10_1 R10_2 R10_3 R10_4 R10_5 R10_6 R10_7 R10_8 R10_9 R11 R11_1 R11_2 R11_3 R11_4 R11_5 R11_6 R11_7 R11_8 R11_9: library part "Resistor 0603"
SENSOR SENSOR_1 SENSOR_2 SENSOR_3 SENSOR_4 SENSOR_5 SENSOR_6 SENSOR_7 SENSOR_8 SENSOR_9: "Header, 4-Pin"

## Via types
v1: diameter 1.27, hole 0.711, Top Layer to Bottom Layer, 220 vias
v2: diameter 1.1, hole 0.711, Top Layer to Bottom Layer, 10 vias